# Altium PCB Pcb.PcbDoc
Units mm, origin at the board's own origin, x right, y up, seen from the top; angles counter-clockwise.
Board outline 100.6 x 141.6 mm, 2 copper layers (Top Layer, Bottom Layer); 201 components, 79 nets, 330 pads, 79 vias.
Unrouted connection lines stored in the file: 3.
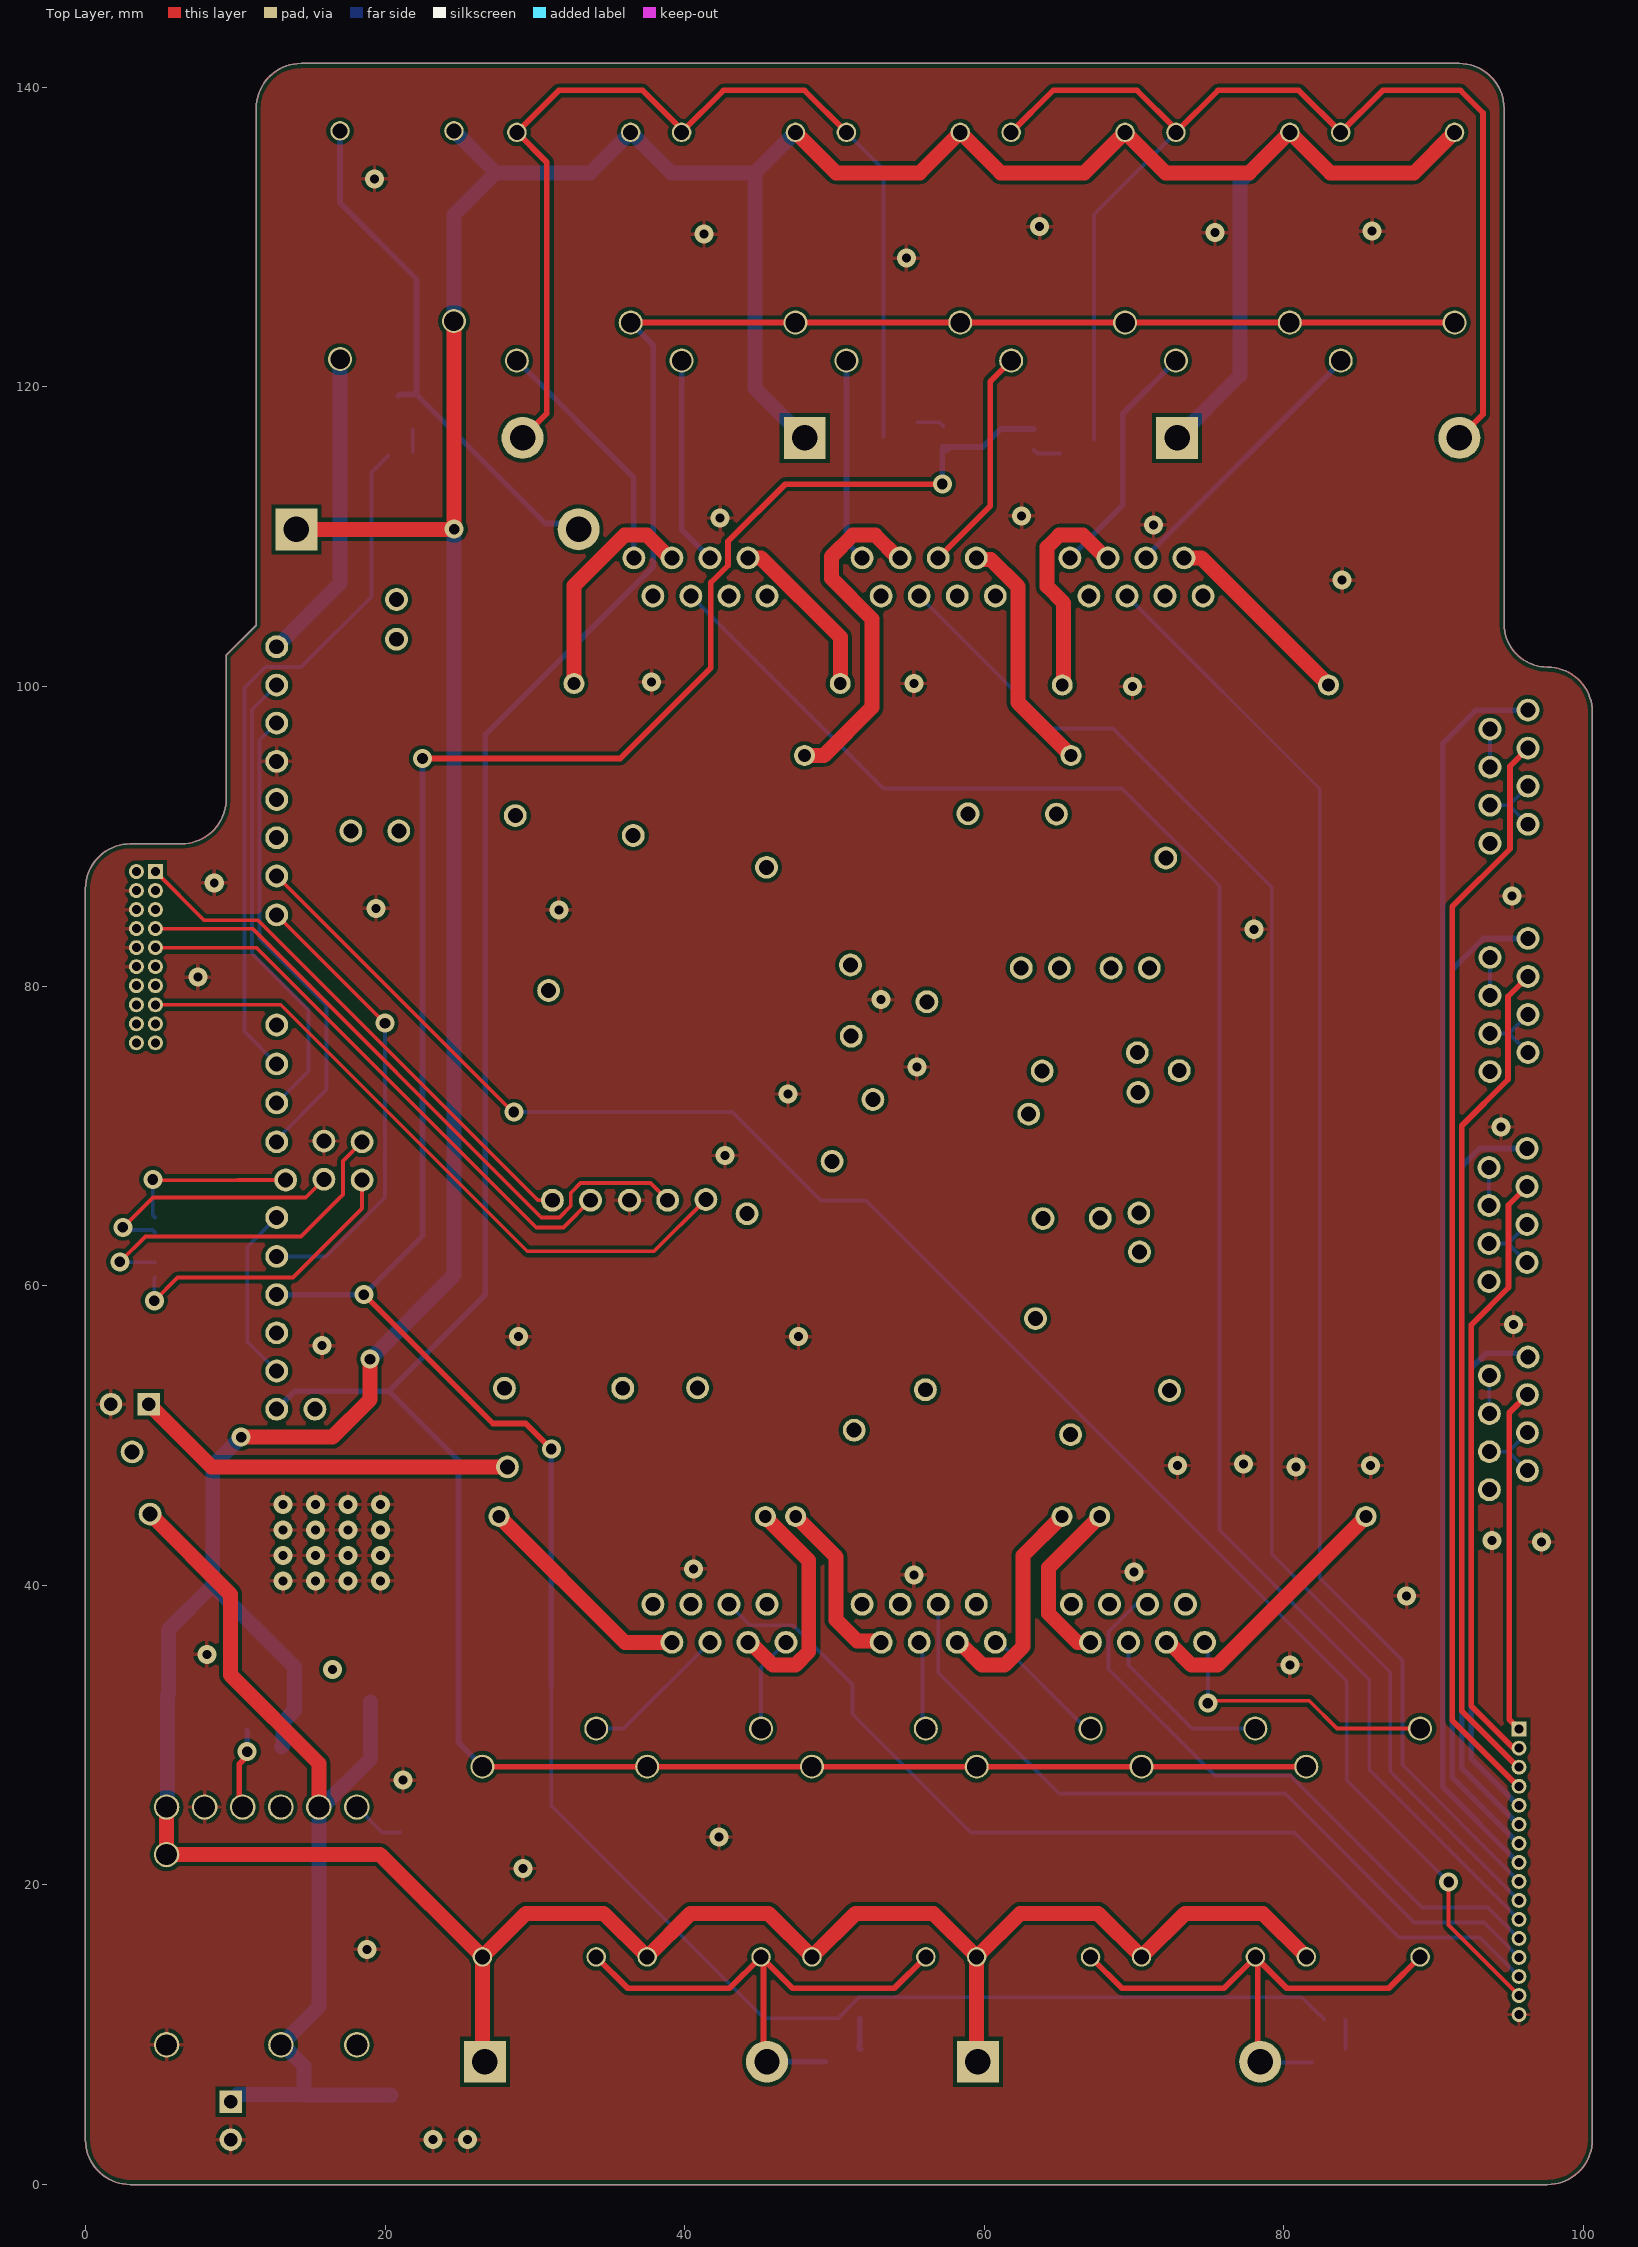
[diagram p0: Top Layer view]
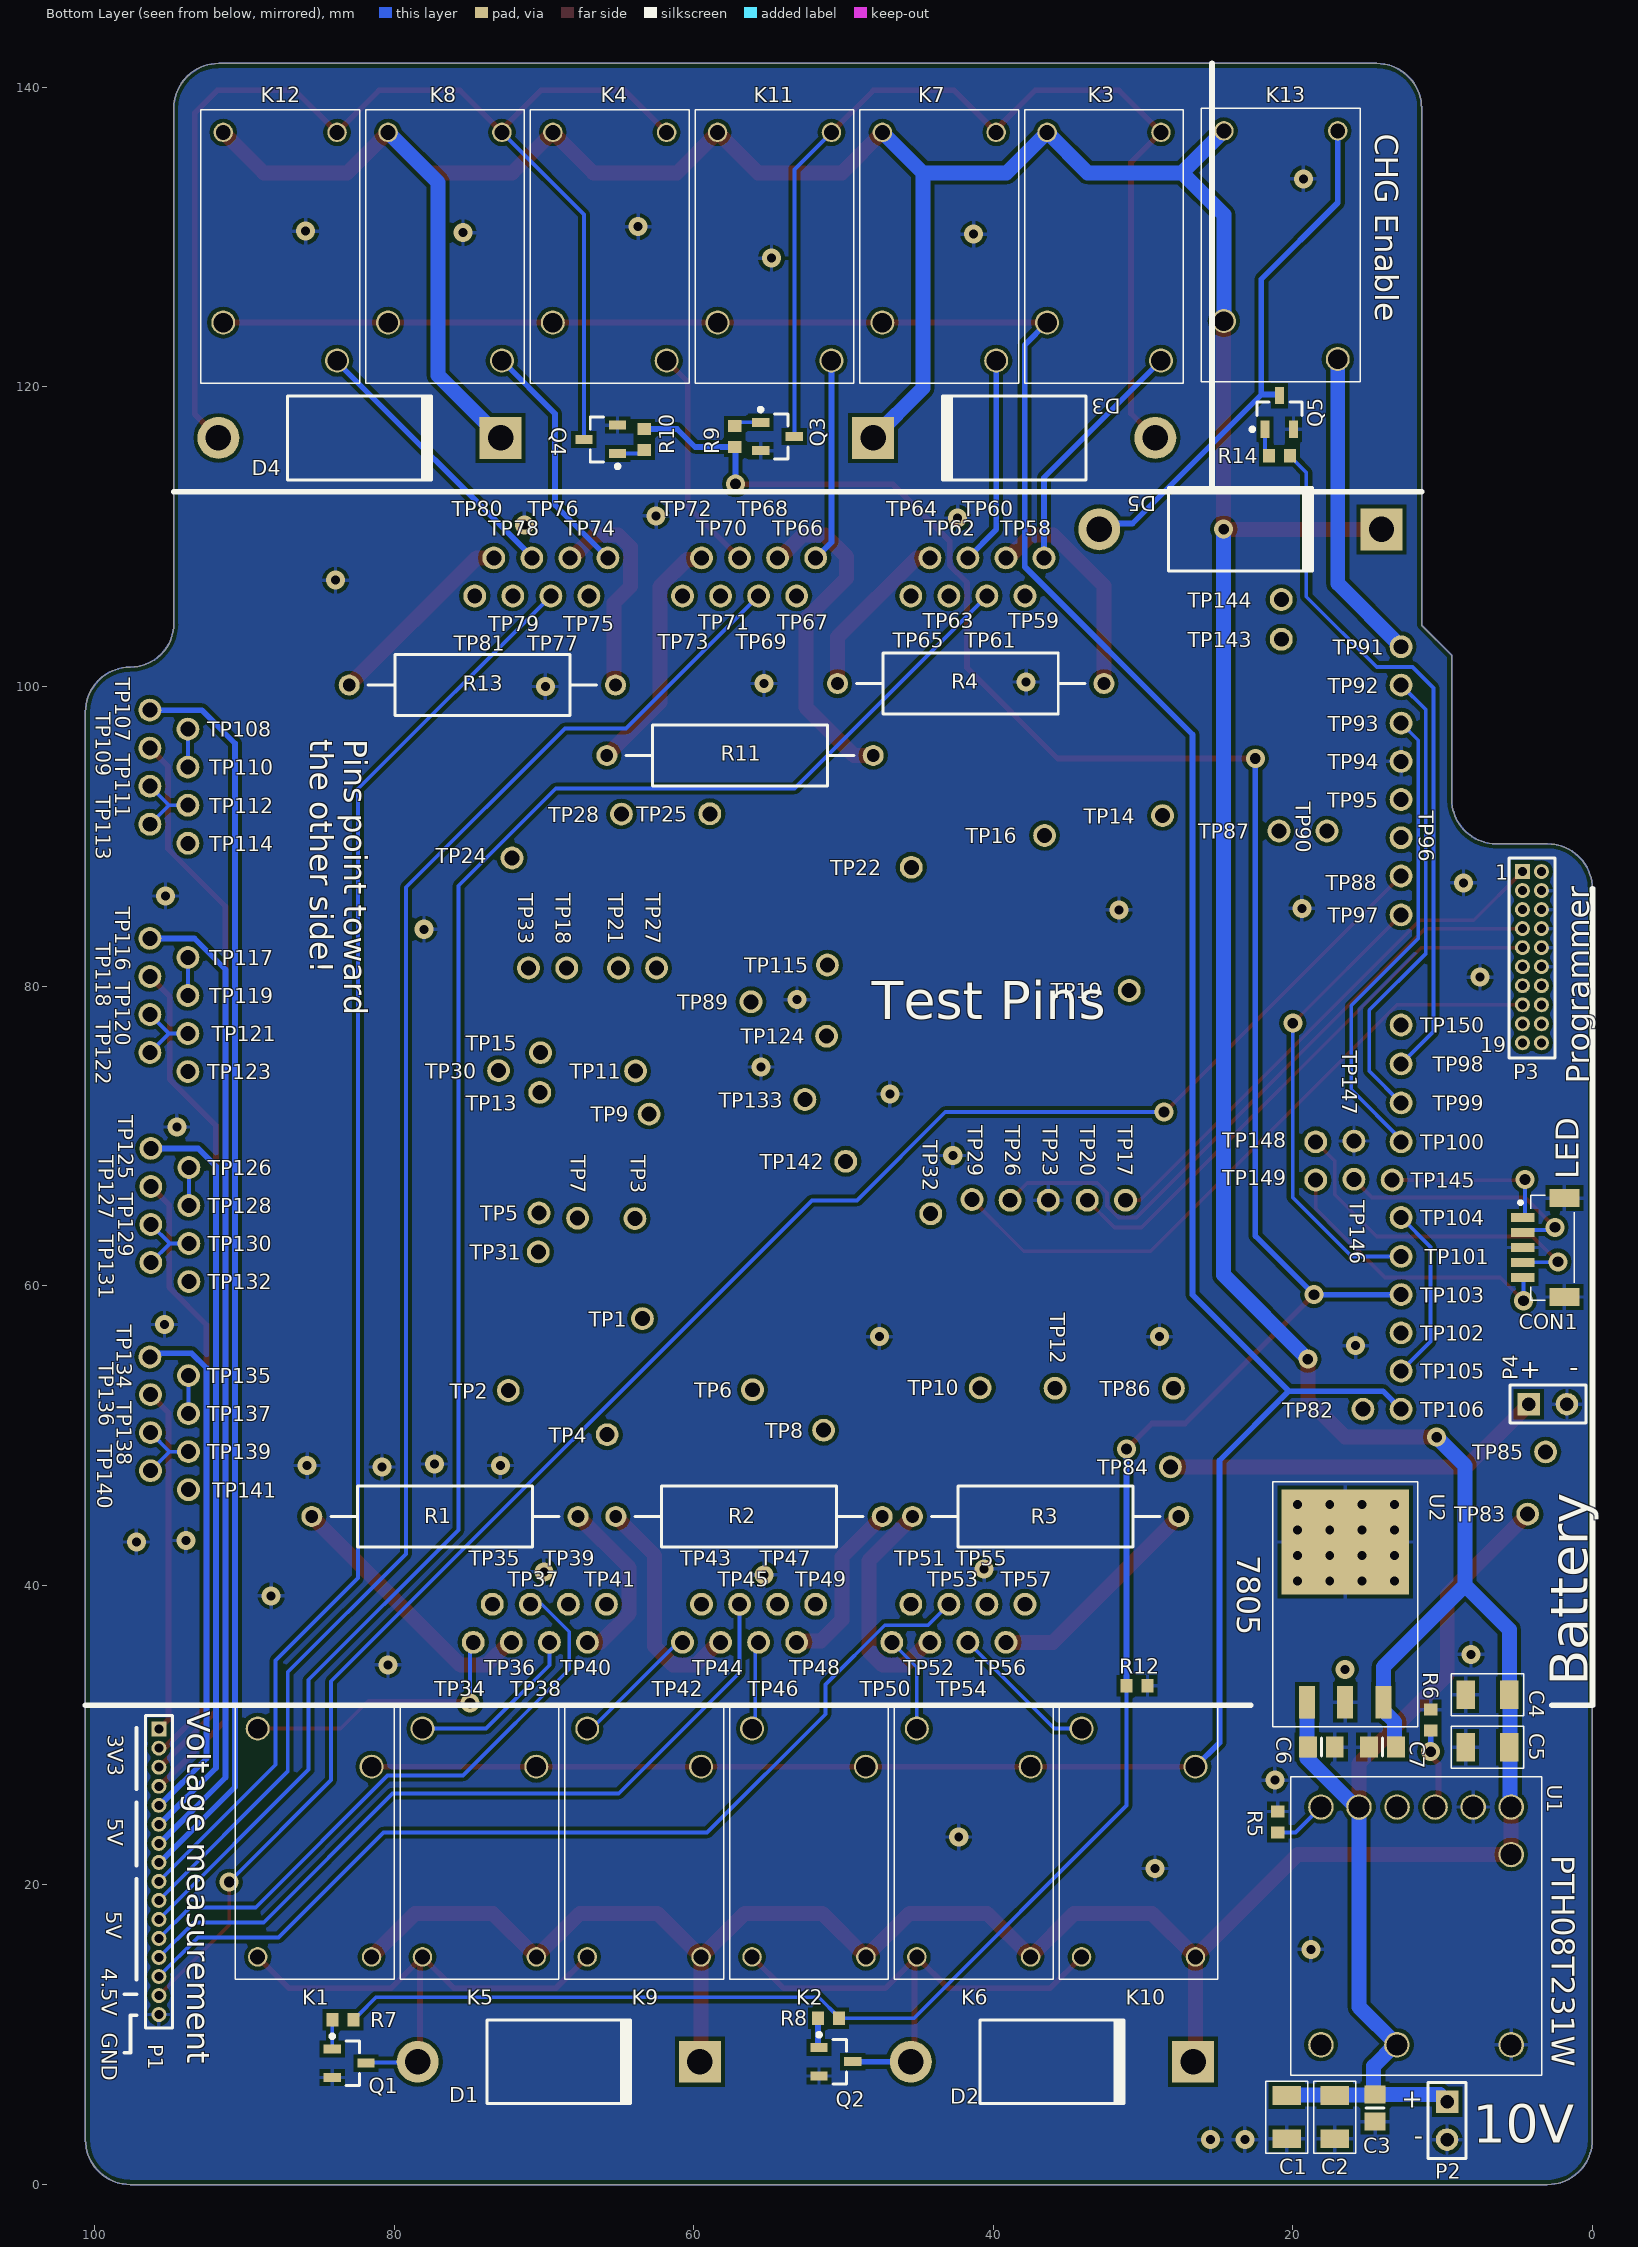
[diagram p1: Bottom Layer view, seen from below]

## Layer stack, top to bottom
Top Solder: solder mask 0.0102, Solder Resist, Dk 3.5
Top Layer: signal copper 0.0356
Dielectric 1: dielectric 0.32, FR-4, Dk 4.8
Bottom Layer: signal copper 0.0356
Bottom Solder: solder mask 0.0102, Solder Resist, Dk 3.5

## Board outline
0,3 ccw(c3,3) 3,0 97.6,0 ccw(c97.6,3) 100.6,3 100.6,98.3 ccw(c97.6,98.3) 97.6,101.3 cw(c97.6,104.2) 94.7,104.2 94.7,138.6 ccw(c91.7,138.6) 91.7,141.6 14.4,141.6 ccw(c14.4,138.6) 11.4,138.6 11.4,104.1 9.4,102.1 9.4,92.5 cw(c6.4,92.5) 6.4,89.5 3,89.5 ccw(c3,86.5) 0,86.5

## Design rules (kind name [scope] priority, off if disabled: settings)
Clearance [All] p1: gap=0.254 ignorepadtopadclearanceinfootprint=FALSE except(0: Arc-Hole Track-Hole SMDPad-Hole THPad-Hole Via-Hole Fill-Hole Poly-Hole Region-Hole Text-Hole)
MinimumSolderMaskSliver [All] p1: minsoldermaskwidth=0.1
PolygonConnect [All] p1: connectstyle=Relief reliefconductorwidth=0.254 reliefentries=4 polygonreliefangle="90 Angle" airgapwidth=0.254
RoutingVias [All] p1: holewidth=0.711 width=1.27 viastyle="Through Hole" minholewidth=0.711 minwidth=1.27 maxholewidth=0.711 maxwidth=1.27
SilkToSolderMaskClearance [IsPad] p1: minsilkscreentomaskgap=0.1 clearancetoexposedcopper=TRUE
SolderMaskExpansion [All] p1: expansion=0.102
Width [All] p1: maxlimit=2.54 minlimit=0.254 preferedwidth=0.254
28 further rules are at their usual default settings.

## Components (designator, comment, footprint, x,y, rotation, side; value= is the part's Value field where it differs from the comment)
C1 "CL31A107MPKNNWE" C3216 20.4,4.5 r90 bottom value=100uF
C2 "CL31A107MPKNNWE" C3216 17.2,4.5 r90 bottom value=100uF
C3 "Cap" 6-0805_N 14.5,5.1 r90 bottom value=22uF
C4 "CL31A107MPKNNWE" C3216 7,32.7 r180 bottom value=100uF
C5 "CL31A107MPKNNWE" C3216 7,29.2 r180 bottom value=100uF
C6 "Cap" 6-0805_N 18.1,29.2 r0 bottom value=220nF
C7 "Cap" 6-0805_N 14,29.2 r180 bottom value=220nF
CON1 "A1001-WR-05-NP" "LED MOLEX" 2.5,62.7 r270 bottom
D1 "1N5406-TP" DO-201AD 69,8.2 r180 bottom
D2 "1N5406-TP" DO-201AD 36.08,8.2 r180 bottom
D3 "1N5406-TP" DO-201AD 38.6,116.6 r0 bottom
D4 "1N5406-TP" DO-201AD 82.3,116.6 r180 bottom
D5 "1N5406-TP" DO-201AD 23.5,110.5 r180 bottom
K1 "Relay-SPST" AHQSH105LM100G 81.5,15.2 r90 bottom
K2 "Relay-SPST" AHQSH105LM100G 48.5,15.2 r90 bottom
K3 "Relay-SPST" AHQSH105LM100G 36.4,137 r270 bottom
K4 "Relay-SPST" AHQSH105LM100G 69.4,137 r270 bottom
K5 "Relay-SPST" AHQSH105LM100G 70.5,15.2 r90 bottom
K6 "Relay-SPST" AHQSH105LM100G 37.5,15.2 r90 bottom
K7 "Relay-SPST" AHQSH105LM100G 47.4,137 r270 bottom
K8 "Relay-SPST" AHQSH105LM100G 80.4,137 r270 bottom
K9 "Relay-SPST" AHQSH105LM100G 59.5,15.2 r90 bottom
K10 "Relay-SPST" AHQSH105LM100G 26.5,15.2 r90 bottom
K11 "Relay-SPST" AHQSH105LM100G 58.4,137 r270 bottom
K12 "Relay-SPST" AHQSH105LM100G 91.4,137 r270 bottom
K13 "Relay-SPST" AHQSH105LM100G 24.6,137.1 r270 bottom
P1 "MHDR1X16" MHDR1X16 95.7,30.4 r270 bottom
P2 "Header 2" HDR1X2 9.7,5.54 r270 bottom
P3 "MHDR2X10" MHDR2X10 4.67,87.65 r270 bottom
P4 "Header 2" HDR1X2 4.24,52.1 r180 bottom
Q1 "NPN" SOT-23_N 83,8.1 r180 bottom
Q2 "NPN" SOT-23_N 50.5,8.2 r180 bottom
Q3 "NPN" SOT-23_N 54.4,116.696 r180 bottom
Q4 "NPN" SOT-23_N 66.2,116.5 r0 bottom
Q5 "NPN" SOT-23_N 20.9,118.3 r90 bottom
R1 "Res2" AXIAL-0.7 76.6,44.6 r180 bottom value=10
R2 "Res2" AXIAL-0.7 56.3,44.6 r180 bottom value=10
R3 "Res2" AXIAL-0.7 36.5,44.6 r180 bottom value=10
R4 "Res2" AXIAL-0.7 41.5,100.2 r0 bottom value=10
R5 "Res2" 1608[0603] 21,24.2 r270 bottom value=20K
R6 "Res2" 1608[0603] 10.8,31 r270 bottom value=100K
R7 "Res2" 1608[0603] 83.4,11 r0 bottom value=1K
R8 "Res2" 1608[0603] 51,11.104 r0 bottom value=1K
R9 "Res2" 1608[0603] 57.254,116.7 r90 bottom value=1K
R10 "Res2" 1608[0603] 63.3,116.5 r270 bottom value=1K
R11 "Res2" AXIAL-0.7 56.9,95.4 r0 bottom value=10
R12 "Res2" 1608[0603] 30.4,33.3 r0 bottom value=1K
R13 "Res2" AXIAL-0.7 74.1,100.1 r0 bottom value=10
R14 "Res2" 1608[0603] 20.9,115.4 r0 bottom value=1K
TP1 "Pin" PIN 63.42,57.81 r90 bottom locked
TP2 "Pin" PIN 72.37,53.01 r90 bottom locked
TP3 "Pin" PIN 63.92,64.485 r90 bottom locked
TP4 "Pin" PIN 65.77,50.06 r90 bottom locked
TP5 "Pin" PIN 70.32,64.86 r90 bottom locked
TP6 "Pin" PIN 56.07,53.06 r90 bottom locked
TP7 "Pin" PIN 67.745,64.51 r90 bottom locked
TP8 "Pin" PIN 51.32,50.36 r90 bottom locked
TP9 "Pin" PIN 62.97,71.46 r90 bottom locked
TP10 "Pin" PIN 40.87,53.185 r90 bottom locked
TP11 "Pin" PIN 63.87,74.335 r90 bottom locked
TP12 "Pin" PIN 35.87,53.16 r90 bottom locked
TP13 "Pin" PIN 70.27,72.91 r90 bottom locked
TP14 "Pin" PIN 28.695,91.385 r90 bottom locked
TP15 "Pin" PIN 70.22,75.56 r90 bottom locked
TP16 "Pin" PIN 36.57,90.06 r90 bottom locked
TP17 "Pin" PIN 31.17,65.71 r90 bottom locked
TP18 "Pin" PIN 68.47,81.21 r90 bottom locked
TP19 "Pin" PIN 30.92,79.71 r90 bottom locked
TP20 "Pin" PIN 33.72,65.71 r90 bottom locked
TP21 "Pin" PIN 65.02,81.21 r90 bottom locked
TP22 "Pin" PIN 45.47,87.935 r90 bottom locked
TP23 "Pin" PIN 36.32,65.71 r90 bottom locked
TP24 "Pin" PIN 72.12,88.56 r90 bottom locked
TP25 "Pin" PIN 58.92,91.51 r90 bottom locked
TP26 "Pin" PIN 38.87,65.71 r90 bottom locked
TP27 "Pin" PIN 62.47,81.21 r90 bottom locked
TP28 "Pin" PIN 64.82,91.485 r90 bottom locked
TP29 "Pin" PIN 41.42,65.76 r90 bottom locked
TP30 "Pin" PIN 73.02,74.36 r90 bottom locked
TP31 "Pin" PIN 70.37,62.26 r90 bottom locked
TP32 "Pin" PIN 44.17,64.81 r90 bottom locked
TP33 "Pin" PIN 71.02,81.21 r90 bottom locked
TP34 "Pin" PIN 74.71,36.2 r270 bottom locked
TP35 "Pin" PIN 73.44,38.74 r270 bottom locked
TP36 "Pin" PIN 72.17,36.2 r270 bottom locked
TP37 "Pin" PIN 70.9,38.74 r270 bottom locked
TP38 "Pin" PIN 69.63,36.2 r270 bottom locked
TP39 "Pin" PIN 68.36,38.74 r270 bottom locked
TP40 "Pin" PIN 67.09,36.2 r270 bottom locked
TP41 "Pin" PIN 65.82,38.74 r270 bottom locked
TP42 "Pin" PIN 60.74,36.2 r270 bottom locked
TP43 "Pin" PIN 59.47,38.74 r270 bottom locked
TP44 "Pin" PIN 58.2,36.2 r270 bottom locked
TP45 "Pin" PIN 56.93,38.74 r270 bottom locked
TP46 "Pin" PIN 55.66,36.2 r270 bottom locked
TP47 "Pin" PIN 54.39,38.74 r270 bottom locked
TP48 "Pin" PIN 53.12,36.2 r270 bottom locked
TP49 "Pin" PIN 51.85,38.74 r270 bottom locked
TP50 "Pin" PIN 46.77,36.2 r270 bottom locked
TP51 "Pin" PIN 45.5,38.74 r270 bottom locked
TP52 "Pin" PIN 44.23,36.2 r270 bottom locked
TP53 "Pin" PIN 42.96,38.74 r270 bottom locked
TP54 "Pin" PIN 41.69,36.2 r270 bottom locked
TP55 "Pin" PIN 40.42,38.74 r270 bottom locked
TP56 "Pin" PIN 39.15,36.2 r270 bottom locked
TP57 "Pin" PIN 37.88,38.74 r270 bottom locked
TP58 "Pin" PIN 36.61,108.59 r90 bottom locked
TP59 "Pin" PIN 37.88,106.05 r90 bottom locked
TP60 "Pin" PIN 39.15,108.59 r90 bottom locked
TP61 "Pin" PIN 40.42,106.05 r90 bottom locked
TP62 "Pin" PIN 41.69,108.59 r90 bottom locked
TP63 "Pin" PIN 42.96,106.05 r90 bottom locked
TP64 "Pin" PIN 44.23,108.59 r90 bottom locked
TP65 "Pin" PIN 45.5,106.05 r90 bottom locked
TP66 "Pin" PIN 51.85,108.59 r90 bottom locked
TP67 "Pin" PIN 53.12,106.05 r90 bottom locked
TP68 "Pin" PIN 54.39,108.59 r90 bottom locked
TP69 "Pin" PIN 55.66,106.05 r90 bottom locked
TP70 "Pin" PIN 56.93,108.59 r90 bottom locked
TP71 "Pin" PIN 58.2,106.05 r90 bottom locked
TP72 "Pin" PIN 59.47,108.59 r90 bottom locked
TP73 "Pin" PIN 60.74,106.05 r90 bottom locked
TP74 "Pin" PIN 65.72,108.59 r90 bottom locked
TP75 "Pin" PIN 66.99,106.05 r90 bottom locked
TP76 "Pin" PIN 68.26,108.59 r90 bottom locked
TP77 "Pin" PIN 69.53,106.05 r90 bottom locked
TP78 "Pin" PIN 70.8,108.59 r90 bottom locked
TP79 "Pin" PIN 72.07,106.05 r90 bottom locked
TP80 "Pin" PIN 73.34,108.59 r90 bottom locked
TP81 "Pin" PIN 74.61,106.05 r90 bottom locked
TP82 "Pin" PIN 15.32,51.76 r90 bottom locked
TP83 "Pin" PIN 4.32,44.76 r90 bottom locked
TP84 "Pin" PIN 28.17,47.91 r90 bottom locked
TP85 "Pin" PIN 3.12,48.91 r90 bottom locked
TP86 "Pin" PIN 27.97,53.16 r90 bottom locked
TP87 "Pin" PIN 20.92,90.36 r90 bottom locked
TP88 "Pin" PIN 12.77,87.36 r90 bottom locked
TP89 "Pin" PIN 56.17,78.96 r90 bottom locked
TP90 "Pin" PIN 17.72,90.36 r0 bottom locked
TP91 "Pin" PIN 12.77,102.66 r180 bottom locked
TP92 "Pin" PIN 12.77,100.1 r180 bottom locked
TP93 "Pin" PIN 12.77,97.56 r180 bottom locked
TP94 "Pin" PIN 12.77,95.01 r180 bottom locked
TP95 "Pin" PIN 12.77,92.46 r180 bottom locked
TP96 "Pin" PIN 12.77,89.91 r180 bottom locked
TP97 "Pin" PIN 12.77,84.76 r90 bottom locked
TP98 "Pin" PIN 12.77,74.81 r180 bottom locked
TP99 "Pin" PIN 12.77,72.21 r180 bottom locked
TP100 "Pin" PIN 12.77,69.61 r180 bottom locked
TP101 "Pin" PIN 12.77,61.96 r180 bottom locked
TP102 "Pin" PIN 12.77,56.86 r90 bottom locked
TP103 "Pin" PIN 12.77,59.41 r180 bottom locked
TP104 "Pin" PIN 12.77,64.56 r180 bottom locked
TP105 "Pin" PIN 12.77,54.31 r180 bottom locked
TP106 "Pin" PIN 12.77,51.76 r180 bottom locked
TP107 "Pin" PIN 96.3,98.43 r180 bottom locked
TP108 "Pin" PIN 93.76,97.16 r180 bottom locked
TP109 "Pin" PIN 96.3,95.89 r180 bottom locked
TP110 "Pin" PIN 93.76,94.62 r180 bottom locked
TP111 "Pin" PIN 96.3,93.35 r180 bottom locked
TP112 "Pin" PIN 93.76,92.08 r180 bottom locked
TP113 "Pin" PIN 96.3,90.81 r180 bottom locked
TP114 "Pin" PIN 93.76,89.54 r180 bottom locked
TP115 "Pin" PIN 51.07,81.41 r90 bottom locked
TP116 "Pin" PIN 96.3,83.19 r180 bottom locked
TP117 "Pin" PIN 93.76,81.92 r180 bottom locked
TP118 "Pin" PIN 96.3,80.65 r180 bottom locked
TP119 "Pin" PIN 93.76,79.38 r180 bottom locked
TP120 "Pin" PIN 96.3,78.11 r180 bottom locked
TP121 "Pin" PIN 93.76,76.84 r180 bottom locked
TP122 "Pin" PIN 96.3,75.57 r180 bottom locked
TP123 "Pin" PIN 93.76,74.3 r180 bottom locked
TP124 "Pin" PIN 51.12,76.66 r90 bottom locked
TP125 "Pin" PIN 96.235,69.17 r180 bottom locked
TP126 "Pin" PIN 93.695,67.9 r180 bottom locked
TP127 "Pin" PIN 96.235,66.63 r180 bottom locked
TP128 "Pin" PIN 93.695,65.36 r180 bottom locked
TP129 "Pin" PIN 96.235,64.09 r180 bottom locked
TP130 "Pin" PIN 93.695,62.82 r180 bottom locked
TP131 "Pin" PIN 96.235,61.55 r180 bottom locked
TP132 "Pin" PIN 93.695,60.28 r180 bottom locked
TP133 "Pin" PIN 52.57,72.435 r90 bottom locked
TP134 "Pin" PIN 96.3,55.25 r180 bottom locked
TP135 "Pin" PIN 93.72,54.005 r180 bottom locked
TP136 "Pin" PIN 96.26,52.735 r180 bottom locked
TP137 "Pin" PIN 93.72,51.465 r180 bottom locked
TP138 "Pin" PIN 96.26,50.195 r180 bottom locked
TP139 "Pin" PIN 93.72,48.925 r180 bottom locked
TP140 "Pin" PIN 96.26,47.655 r180 bottom locked
TP141 "Pin" PIN 93.72,46.385 r180 bottom locked
TP142 "Pin" PIN 49.845,68.31 r90 bottom locked
TP143 "Pin" PIN 20.77,103.16 r90 bottom locked
TP144 "Pin" PIN 20.77,105.81 r90 bottom locked
TP145 "Pin" PIN 13.37,67.06 r90 bottom locked
TP146 "Pin" PIN 15.92,67.11 r90 bottom locked
TP147 "Pin" PIN 15.92,69.66 r90 bottom locked
TP148 "Pin" PIN 18.47,69.61 r90 bottom locked
TP149 "Pin" PIN 18.47,67.06 r90 bottom locked
TP150 "Pin" PIN 12.77,77.41 r90 bottom locked
U1 "PTH08T231W" PTH08T231W 5.42,9.33 r90 bottom
U2 "7805S" TO-263-3 16.5,32.2 r90 bottom

## Footprints (in the part's own frame and the unit in brackets; to place one, negate y for a bottom-side part, rotate by r counter-clockwise, add the part's x,y. Pads: shape width x height; smd on the part's side, far side on the other; paste and mask are expansions set on the pad)
6-0805_N [mm] "Chip Resistor, Body 2.0x1.2mm, IPC Medium Density"
  rect 1.2x1.4 smd: 1(-0.9,0) 2(0.9,0)
  silkscreen extent 0,-0.6 0,0.6, body extent -1.07,-0.7 1.07,0.7, height 0.7
1608[0603] [mm] "Chip Capacitor, Body 1.6x0.8mm, IPC High Density"
  rect 0.8x0.9 smd: 1(-0.7,0) 2(0.7,0)
  body extent -0.87,-0.48 0.87,0.48, height 1.3
AHQSH105LM100G [mm]
  round 1.6 hole 1.3: 1(12.7,0) 2(15.24,7.6)
  round 1.3 hole 1: 3(0,0) 4(0,7.6)
  silkscreen extent -1.5,-1.5 16.74,9.1
AXIAL-0.7 [mm] "Axial Device, Thru-Hole; 2 Leads; 0.7 in Pin Spacing"
  round 1.4 hole 0.85: 1(-8.89,0) 2(8.89,0)
  silkscreen extent -7.62,-2.03 7.62,2.03
C3216 [mm]
  rect 1.25x1.9 smd: 1(-1.45,0) 2(1.45,0)
  silkscreen extent -2.41,-1.4 2.41,1.4
DO-201AD [mm] "Diode, Axial; Body 9.5 x 5.6 mm (LxDia. max), Lead Dia. 1.32 mm (max)"
  round 2.8 hole 1.7: 1(-9.42,0)
  rect 2.8x2.8 hole 1.7: 2(9.42,0)
  silkscreen extent -4.8,-2.8 4.9,2.8
HDR1X2 [mm] "Connector; Header; 2 Position"
  rect 1.5x1.5 hole 0.9: 1(0,0)
  round 1.5 hole 0.9: 2(2.54,0)
  silkscreen extent -1.27,-1.27 3.81,1.27
"LED MOLEX" [mm]
  rect 0.6x1.55 smd paste-0.025 mask+0.05: 1(-1.85,-2.15) 2(-0.85,-2.15) 3(0.15,-2.15) 4(1.15,-2.15) 5(2.15,-2.15)
  rect 1.2x2 smd paste-0.025 mask+0.05: SH(-3.15,0.625) SH(3.45,0.625)
  silkscreen extent -3.35,-2.4 3.65,1.3, body extent -3.35,-2.3 3.65,1.3, height 4.28
MHDR1X16 [mm] "Connector; Header; 16 Position"
  rect 1x1 hole 0.6: 1(0,0)
  round 1 hole 0.6: 2(1.27,0) 3(2.54,0) 4(3.81,0) 5(5.08,0) 6(6.35,0) 7(7.62,0) 8(8.89,0) 9(10.16,0) 10(11.43,0) 11(12.7,0) 12(13.97,0) 13(15.24,0) 14(16.51,0) 15(17.78,0) 16(19.05,0)
  silkscreen extent -0.9,-0.9 19.95,0.9
MHDR2X10 [mm] "Connector; Header; 10x2 Position"
  rect 1x1 hole 0.6: 1(0,0)
  round 1 hole 0.6: 2(0,1.27) 3(1.27,0) 4(1.27,1.27) 5(2.54,0) 6(2.54,1.27) 7(3.81,0) 8(3.81,1.27) 9(5.08,0) 10(5.08,1.27) 11(6.35,0) 12(6.35,1.27) 13(7.62,0) 14(7.62,1.27) 15(8.89,0) 16(8.89,1.27) 17(10.16,0) 18(10.16,1.27) 19(11.43,0) 20(11.43,1.27)
  silkscreen extent -0.9,-0.9 12.43,2.17
PIN [mil] "Test pin"
  round 60 hole 39.37: 1(0,0)
PTH08T231W [mm]
  round 1.7 hole 1.4: 1(0,12.7) 2(0,7.63) 3(0,0) 4(12.7,0) 5(15.87,0) 6(15.87,2.54) 7(15.87,5.08) 8(15.87,7.62) 9(15.87,10.16) 10(15.87,12.7)
  silkscreen extent -2.03,-2.03 17.9,14.73
SOT-23_N [mm] "SOT23, 3-Leads, Body 2.9x1.3mm, Pitch 0.95mm, Lead Span 2.5mm, IPC Medium Density"
  rect 1.15x0.6 smd: 1(-1.125,0.95) 2(-1.125,-0.95) 3(1.125,0)
  silkscreen extent -1.25,-1.5 0.7,1.92, body extent -0.7,-1.5 0.7,1.5, height 1.1
TO-263-3 [mm]
  rect 2.16x1.07 smd: 1(0,2.54) 2(0,0) 3(0,-2.54)
  rect 7x8.5 smd: 4(10.7,0)
  silkscreen extent -1.65,-4.83 14.73,4.83

## Part data
C1 C2 C4 C5: library part Cap, "Capacitor", LatestRevisionDate=17-Jul-2002, LatestRevisionNote="Re-released for DXP Platform.", PackageDescription="Radial Cap, Thru-Hole; 2 Leads; 0.3 in Pin Spacing", PackageReference=RAD-0.3, PartNumber=CL31A107MPKNNWE, Published=8-Jun-2000, Publisher="Altium Limited"
C3 C6 C7: "Capacitor", LatestRevisionDate=17-Jul-2002, LatestRevisionNote="Re-released for DXP Platform.", PackageDescription="Radial Cap, Thru-Hole; 2 Leads; 0.3 in Pin Spacing", PackageReference=RAD-0.3, Published=8-Jun-2000, Publisher="Altium Limited"
CON1: library part "LED molex", PartNumber=A1001-WR-05-NP
D1 D2 D3 D4 D5: library part Diode, Code_JEDEC=DO-214-AB, LatestRevisionDate=17-Jul-2002, LatestRevisionNote="Re-released for DXP Platform.", PackageDescription="DO-214-AB/SMC; 2 C-Bend Leads; Body 7.9 x 5.9 mm, inc. leads (LxW)", PackageReference=SMC, PackageVersion=Sep-1996, PartNumber=1N5406-TP, Published=8-Jun-2000, Publisher="Altium Limited"
K1 K2 K3 K4 K5 K6 K7 K8 K9 K10 K11 K12 K13: "Single-Pole Single-Throw Relay", LatestRevisionDate=17-Jul-2002, LatestRevisionNote="Re-released for DXP Platform.", PackageReference=MODULE4, Published=24-Mar-1999, Publisher="Altium Limited"
P1: "Header, 16-Pin", LatestRevisionDate=17-Jul-2002, LatestRevisionNote="Re-released for DXP Platform.", Publisher="Altium Limited"
P2 P4: "Header, 2-Pin", LatestRevisionDate=17-Jul-2002, LatestRevisionNote="Re-released for DXP Platform.", Publisher="Altium Limited"
P3: "Header, 10-Pin, Dual row", LatestRevisionDate=17-Jul-2002, LatestRevisionNote="Re-released for DXP Platform.", Publisher="Altium Limited"
Q1 Q2 Q3 Q4 Q5: "NPN Bipolar Transistor MMBT2222A", Part Number=MMBT2222A, Code_JEDEC=TO-226-AA, LatestRevisionDate=17-Jul-2002, LatestRevisionNote="Re-released for DXP Platform.", PackageDescription="TO, Flat Index; 3 In-Line, Axial Leads; Body Dia. 4.8mm; Leads 0.55 x 0.51 mm (max)", PackageReference=TO-226-AA, Published=8-Jun-2000, Publisher="Altium Limited"
R1 R2 R3 R4 R11 R13: "Resistor EP5WS10RJ 10R 5W", PartNumber=EP5WS10RJ, LatestRevisionDate=17-Jul-2002, LatestRevisionNote="Re-released for DXP Platform.", PackageDescription="Axial Device, Thru-Hole; 2 Leads; 0.4 in Pin Spacing", PackageReference=AXIAL-0.4, Published=8-Jun-2000, Publisher="Altium Limited"
R5 R6 R7 R8 R9 R10 R12 R14: "Resistor", LatestRevisionDate=17-Jul-2002, LatestRevisionNote="Re-released for DXP Platform.", PackageDescription="Axial Device, Thru-Hole; 2 Leads; 0.4 in Pin Spacing", PackageReference=AXIAL-0.4, Published=8-Jun-2000, Publisher="Altium Limited"
TP1 TP2 TP3 TP4 TP5 TP6 TP7 TP8 TP9 TP10 TP11 TP12 TP13 TP14 TP15 TP16 TP17 TP18 TP19 TP20 TP21 TP22 TP23 TP24 TP25 TP26 TP27 TP28 TP29 TP30 TP31 TP32 TP33 TP34 TP35 TP36 TP37 TP38 TP39 TP40 TP41 TP42 TP43 TP44 TP45 TP46 TP47 TP48 TP49 TP50 TP51 TP52 TP53 TP54 TP55 TP56 TP57 TP58 TP59 TP60 TP61 TP62 TP63 TP64 TP65 TP66 TP67 TP68 TP69 TP70 TP71 TP72 TP73 TP74 TP75 TP76 TP77 TP78 TP79 TP80 TP81 TP82 TP83 TP84 TP85 TP86 TP87 TP88 TP89 TP90 TP91 TP92 TP93 TP94 TP95 TP96 TP97 TP98 TP99 TP100 TP101 TP102 TP103 TP104 TP105 TP106 TP107 TP108 TP109 TP110 TP111 TP112 TP113 TP114 TP115 TP116 TP117 TP118 TP119 TP120 TP121 TP122 TP123 TP124 TP125 TP126 TP127 TP128 TP129 TP130 TP131 TP132 TP133 TP134 TP135 TP136 TP137 TP138 TP139 TP140 TP141 TP142 TP143 TP144 TP145 TP146 TP147 TP148 TP149 TP150: "Testing pin"

## Via types
v1: diameter 1.27, hole 0.6, Top Layer to Bottom Layer, tented both sides, 63 vias
v2: diameter 1.27, hole 0.711, Top Layer to Bottom Layer, tented both sides, 16 vias

## Nets (pads, with @x,y where several pads share a name; then routed paths per layer and width w, separated by ;. In a path a pad name is that pad's centre, name@x,y a point inside that pad or via, vN(x,y) a via of type N, cw(c..) or ccw(c..) an arc to the next point about the centre after c; other vN are vias at no path point)
5V: CON1.1 TP145.1 | length 11.5
  Top Layer w0.254: v2(4.5,67.1) 4.55,67.05 10.15,67.05 10.16,67.06 TP145.1
  Bottom Layer w0.254: v2(4.5,67.1) 4.5,64.7 CON1.1
+5: C4.2 C5.2 C7.2 D1.2 D2.2 D3.2 D4.2 D5.2 K1.3 K2.3 K3.3 K4.3 K5.3 K6.3 K7.3 K8.3 K9.3 K10.3 K11.3 K12.3 K13.1 K13.3 U1.4 U1.5 U2.3 | length 377.4
  Top Layer w1: U1.5 U1.4 19.67,22.03 K10.3 ; v2(10.4,49.9) 16.5,49.9 19,52.4 v2(19,55.1) ; D5.2 24.6,110.5 v2(24.613,110.513) 24.613,124.387 K13.1 ; D2.2@26.58,8.2 26.5,8.28 K10.3 ; K7.3 50.1,134.3 55.7,134.3 K11.3 61.1,134.3 66.7,134.3 K4.3 72.1,134.3 77.7,134.3 K8.3 83.1,134.3 88.7,134.3 K12.3 ; D1.2 59.5,8.28 K9.3 ; K1.3 78.6,18.1 73.4,18.1 K5.3 67.6,18.1 62.4,18.1 K9.3 ; K10.3 29.4,18.1 34.6,18.1 K6.3 40.4,18.1 45.6,18.1 K2.3 51.4,18.1 56.6,18.1 K9.3
  Bottom Layer w1: U1.5 5.485,25.265 5.485,32.635 C4.2 5.55,37.05 8.5,40 8.5,40.005 ; v2(10.4,49.9) 8.5,48 8.5,40.005 ; C7.2 13.2,29.3 13.2,30.895 13.96,31.655 U2.3 13.96,34.545 8.5,40.005 ; D5.2@14.08,109.88 D5.2 ; v2(19,55.1) 24.613,60.712 v2(24.613,110.513) ; K13.1 24.6,131.5 27.4,134.3 ; K13.3 27.4,134.3 ; K7.3 44.7,134.3 ; D3.2 44.7,119.92 44.7,134.3 ; D4.2 77.061,120.781 77.061,133.661 K8.3 ; 27.4,134.3 33.7,134.3 K3.3 39.1,134.3 44.7,134.3
+10: C1.2 C2.2 C3.2 C6.2 P2.1 TP83.1 U1.2 U1.9 U2.1 | length 64.7
  Top Layer w1: TP83.1 9.689,39.391 9.689,34.011 15.58,28.12 U1.9
  Bottom Layer w1: P2.1 10.16,6 C3.2 ; U2.1 19.04,28.44 15.8,25.2 U1.9 15.58,11.86 U1.2 13.17,9.33 14.6,7.9 14.6,6.1 C3.2 ; C1.2 20.375,5.975 14.525,5.975 C3.2
CHG_EN: D5.1 K13.4 Q5.3 | length 35.5
  Bottom Layer w0.254: K13.4@16.573,137.15 K13.4@16.575,137.15
  Bottom Layer w0.381: K13.4 17,132.3 22.1,127.2 22.1,119.5 ; Q5.3 20.975,119.5 22.1,119.5 ; D5.1 32.528,110.892 30.708,110.892 22.1,119.5
GND: C1.1 C2.1 C3.1 C4.1 C5.1 C6.1 C7.1 CON1.3 CON1.SH P1.16 P2.2 P3.4 P3.6 P3.8 P3.10 P3.12 P4.2 Q1.2 Q2.2 Q3.2 Q4.2 Q5.2 R5.1 R6.1 R12.1 TP23.1 TP94.1 TP147.1 U1.3 U1.6 U2.2 U2.4
  other v1: 23.2,3 25.5,3 18.8,15.7 29.2,21.1 42.3,23.2 21.2,27 80.4,34.7 8.1,35.4 88.2,39.3 13.2,40.3 15.367,40.3 17.533,40.3 19.7,40.3 55.3,40.7 70,40.9 40.6,41.1 13.2,42 15.367,42 17.533,42 19.7,42 97.2,42.9 93.9,43 13.2,43.7 15.367,43.7 17.533,43.7 19.7,43.7 13.2,45.4 15.367,45.4 17.533,45.4 19.7,45.4 80.8,47.9 72.9,48 85.8,48 77.3,48.1 15.8,56 28.9,56.6 47.6,56.6 95.327,57.42 42.7,68.7 94.5,70.6 46.9,72.8 55.5,74.6 53.1,79.1 7.5,80.6 78,83.8 31.6,85.1 19.4,85.2 95.248,86.023 8.6,86.9 69.9,100 55.3,100.2 37.8,100.3 83.9,107.1 71.3,110.8 42.377,111.248 62.5,111.4 54.8,128.6 41.3,130.2 75.4,130.3 85.9,130.4 63.7,130.7 19.3,133.9
MOTOR_ENC_INPUT: K1.1 K2.1 K3.1 K4.1 K5.1 K6.1 K7.1 K8.1 K9.1 K10.1 K11.1 K12.1 TP106.1 | length 225
  Top Layer w0.381: K10.1 K6.1 K2.1 K9.1 K5.1 K1.1 ; K3.1 K7.1 K11.1 K4.1 K8.1 K12.1
  Bottom Layer w0.381: TP106.1 13.976,52.967 20.267,52.967 ; K10.1@26.5,28.04 K10.1 24.9,29.5 24.9,48.333 20.267,52.967 ; K3.1 37.9,122.8 37.9,108 26.7,96.8 26.7,59.4 20.267,52.967
NetD1_1: D1.1 K1.4 K5.4 K9.4 Q1.3 | length 35.9
  Top Layer w0.381: K9.4 69.2,13.1 76,13.1 K5.4 K5.4@78.26,15.04 ; D1.1@78.47,8.15 D1.1 78.26,8.36 K5.4@78.26,15.04 ; K1.4 87,13.1 80.2,13.1 K5.4@78.26,15.04
  Bottom Layer w0.254: D1.1@78.47,8.15 Q1.3@81.875,8.15
NetD2_1: D2.1 K2.4 K6.4 K10.4 Q2.3 | length 36.3
  Top Layer w0.381: K10.4 36.2,13.1 43,13.1 K6.4 ; D2.1@45.26,8.36 45.26,15.04 47.2,13.1 54,13.1 K2.4
  Bottom Layer w0.254: K6.4 K6.4@45.26,15.04 ; D2.1@45.26,8.36 D2.1@45.42,8.2
  Bottom Layer w0.381: D2.1@45.42,8.2 46.375,8.2 Q2.3
NetD3_1: D3.1 K3.4 K7.4 K11.4 Q3.3 | length 70
  Top Layer w0.381: D3.1 30.8,118.22 30.8,135 K3.4 31.6,139.8 37.2,139.8 39.8,137.2 K7.4 42.6,139.8 48,139.8 K11.4
  Bottom Layer w0.254: K11.4 53.275,134.525 Q3.3
NetD4_1: D4.1 K4.4 K8.4 K12.4 Q4.3 | length 83.2
  Top Layer w0.381: K4.4 64.6,139.8 70.2,139.8 72.8,137.2 K8.4 75.6,139.8 81,139.8 K12.4 86.6,139.8 91.8,139.8 93.3,138.3 93.3,118.18 D4.1
  Bottom Layer w0.254: Q4.3 67.325,131.525 K8.4
NetK1_2: K1.2 TP34.1 | length 19.2
  Top Layer w0.254: v2(74.932,32.134) 75.098,32.3 81.7,32.3 83.56,30.44 K1.2
  Bottom Layer w0.254: TP34.1 74.7,36.19 74.932,35.958 v2(74.932,32.134)
NetK2_2: K2.2 TP46.1 | length 5.9
  Bottom Layer w0.254: TP46.1 55.879,35.981 55.879,30.661 K2.2
NetK3_2: K3.2 TP58.1 | length 16.4
  Bottom Layer w0.381: K3.2 36.61,113.95 TP58.1
NetK4_2: K4.2 TP70.1 | length 15.2
  Top Layer w0.381: TP70.1 60.4,112.06 60.4,120.36 K4.2
NetK5_2: K5.2 TP38.1 | length 11.8
  Bottom Layer w0.254: TP38.1 69.63,34.67 73.86,30.44 K5.2
NetK6_2: K6.2 TP50.1 | length 6.5
  Bottom Layer w0.254: K6.2 45.1,34.53 TP50.1
NetK7_2: K7.2 TP62.1 | length 14
  Bottom Layer w0.381: K7.2 39.8,110.48 TP62.1
NetK8_2: K8.2 TP74.1 | length 16.1
  Bottom Layer w0.381: TP74.1 69.253,112.123 69.253,118.213 K8.2
NetK9_2: K9.2 TP42.1 | length 8.7
  Bottom Layer w0.254: TP42.1 61.04,36.2 66.8,30.44 K9.2
NetK10_2: K10.2 TP54.1 | length 10
  Bottom Layer w0.254: K10.2 35.93,30.44 TP54.1
NetK11_2: K11.2 TP66.1 | length 13.6
  Bottom Layer w0.381: K11.2 50.8,109.64 TP66.1
NetK12_2: K12.2 TP78.1 | length 18.6
  Bottom Layer w0.381: TP78.1 70.8,108.675 83.8,121.675 K12.2
NetK13_2: K13.2 TP91.1 | length 21
  Bottom Layer w1: TP91.1 17,106.89 K13.2
NetP1_1: P1.1 TP136.1 | length 23.1
  Top Layer w0.381: P1.1 95.053,31.047 95.053,51.529 TP136.1
NetP1_2: P1.2 TP127.1 | length 40.6
  Top Layer w0.381: P1.2 95.341,29.13 92.513,31.958 92.513,57.392 95,59.879 95,65.395 TP127.1
NetP1_3: P1.3 TP118.1 | length 56.2
  Top Layer w0.381: P1.3 95.634,27.86 91.878,31.616 91.878,70.678 94.966,73.766 94.966,79.317 TP118.1
NetP1_4: P1.4 TP109.1 | length 73.3
  Top Layer w0.381: P1.4 95.634,26.59 91.243,30.981 91.243,85.317 95.093,89.167 95.093,94.684 TP109.1
NetP1_5: P1.5 TP134.1 | length 34.8
  Bottom Layer w0.381: P1.5 95.634,25.32 92.513,28.441 92.513,54.505 93.509,55.5 96.05,55.5 TP134.1
NetP1_6: P1.6 TP125.1 | length 50.4
  Bottom Layer w0.381: P1.6 95.634,24.05 91.878,27.806 91.878,67.978 93.07,69.17 TP125.1
NetP1_7: P1.7 TP116.1 | length 66.1
  Bottom Layer w0.381: P1.7 95.634,22.78 91.243,27.171 91.243,81.11 93.324,83.19 TP116.1
NetP1_8: P1.8 TP107.1 | length 83.5
  Bottom Layer w0.381: P1.8 95.634,21.51 90.608,26.536 90.608,96.208 92.83,98.43 TP107.1
NetP1_9: P1.9 TP77.1 | length 96.6
  Bottom Layer w0.254: TP77.1 82.4,93.18 82.4,40.5 87.919,34.981 87.919,28.021 P1.9
NetP1_10: P1.10 TP69.1 | length 106.1
  Bottom Layer w0.254: TP69.1 64.505,97.205 68.595,97.205 79.2,86.6 79.2,42.1 87.1,34.2 87.1,27.57 P1.10
NetP1_11: P1.11 TP61.1 | length 120.6
  Bottom Layer w0.254: TP61.1 53.27,93.2 69.2,93.2 75.7,86.7 75.7,51.1 75.7,43.7 85.7,33.7 85.7,27.7 P1.11
NetP1_12: P1.12 TP37.1 | length 40.7
  Bottom Layer w0.254: TP37.1 70.14,38.74 68.3,36.9 68.3,34.4 75.4,27.3 80.43,27.3 89.23,18.5 93.63,18.5 P1.12
NetP1_13: P1.13 TP45.1 | length 51.2
  Bottom Layer w0.254: TP45.1 56.93,34.17 65,26.1 80.1,26.1 88.7,17.5 93.36,17.5 P1.13
NetP1_14: P1.14 TP53.1 | length 64.2
  Bottom Layer w0.254: TP53.1 44.357,37.343 47.243,37.343 51.2,33.386 51.2,31.4 59.1,23.5 80.7,23.5 87.7,16.5 93.09,16.5 P1.14
NetP1_15: P1.15 TP88.1 | length 119.4
  Top Layer w0.254: TP88.1 28.53,71.6 v2(28.6,71.6) ; v2(91,20.2) 91,17.32 P1.15
  Bottom Layer w0.254: v2(28.6,71.6) 43.2,71.6 49.1,65.7 52.1,65.7 84.2,33.6 84.2,27 v2(91,20.2)
NetQ1_1: Q1.1 R7.2 | length 2
  Bottom Layer w0.254: R7.2 84.125,10.975 Q1.1
NetQ2_1: Q2.1 R8.2 | length 2.1
  Bottom Layer w0.381: R8.2 51.7,9.225 Q2.1 Q2.1@51.734,9.041
NetQ3_1: Q3.1 R9.2 | length 1.8
  Bottom Layer w0.254: Q3.1 57.009,117.646 R9.2
NetQ4_1: Q4.1 R10.2 | length 1.9
  Bottom Layer w0.254: R10.2 63.55,115.55 Q4.1
NetQ5_1: Q5.1 R14.2 | length 1.5
  Bottom Layer w0.254: R14.2@21.85,115.65 Q5.1
NetR1_1: R1.1 TP36.1 | length 18.1
  Top Layer w1: TP36.1 72.312,36.2 73.828,34.684 75.574,34.684 R1.1
NetR1_2: R1.2 TP40.1 | length 11.5
  Top Layer w1: TP40.1 66.216,36.2 64.304,38.112 64.304,41.194 R1.2
NetR2_1: R2.1 TP44.1 | length 15.3
  Top Layer w1: TP44.1 58.342,36.2 59.858,34.684 61.368,34.684 62.6,35.916 62.6,42.01 R2.1
NetR2_2: R2.2 TP48.1 | length 11.7
  Top Layer w1: R2.2 50.1,41.91 50.1,37.7 51.5,36.3 53.02,36.3 TP48.1
NetR3_1: R3.1 TP52.1 | length 15.3
  Top Layer w1: TP52.1 44.372,36.2 45.888,34.684 47.398,34.684 48.286,35.572 48.286,41.668 45.39,44.564 R3.1
NetR3_2: R3.2 TP56.1 | length 15
  Top Layer w1: R3.2 36.01,36.2 TP56.1
NetR4_1: R4.1 TP60.1 | length 15.1
  Top Layer w1: R4.1 32.61,106.734 35.982,110.106 37.492,110.106 39.008,108.59 TP60.1
NetR4_2: R4.2 TP64.1 | length 11.5
  Top Layer w1: TP64.1 45.104,108.59 50.39,103.304 R4.2
NetR5_2: R5.2 U1.10 | length 3.6
  Bottom Layer w0.254: U1.10 19.82,23.5 R5.2
NetR6_2: R6.2 U1.7 | length 5.4
  Top Layer w0.381: U1.7 10.27,25.43 10.27,28.07 10.8,28.6 v2(10.8,28.9)
  Bottom Layer w0.381: v2(10.8,28.9) R6.2
NetR7_1: R7.1 R8.1 R9.1 R10.1 R12.2 TP103.1 | length 198.2
  Top Layer w0.381: v2(18.59,59.41) 27.2,50.8 29.4,50.8 v2(31.1,49.1) ; v2(22.5,95.2) 35.7,95.2 41.753,101.253 41.753,106.947 42.896,108.09 42.896,109.696 46.712,113.512 57.188,113.512 v2(57.2,113.523)
  Bottom Layer w0.254: R12.2 31.1,25.3 45.296,11.104 R8.1 50.3,11.154 51.646,12.5 81.2,12.5 82.377,11.323 82.427,11.323 82.7,11.05 R7.1
  Bottom Layer w0.381: TP103.1 v2(18.59,59.41) 22.5,63.32 v2(22.5,95.2) ; R12.2 v2(31.1,49.1) ; v2(57.2,113.523) 57.2,115.791 R9.1@57.514,115.791 ; R9.1 59.9,116 61.1,117.2 R10.1
NetR11_1: R11.1 TP68.1 | length 22.8
  Top Layer w1: R11.1 49.3,95.4 52.5,98.6 52.5,104.526 49.8,107.226 49.8,108.684 51.222,110.106 52.732,110.106 54.248,108.59 TP68.1
NetR11_2: R11.2 TP72.1 | length 16.3
  Top Layer w1: TP72.1 59.57,108.49 60.444,108.49 62.256,106.678 62.256,98.934 R11.2
NetR13_1: R13.1 TP76.1 | length 14.7
  Top Layer w1: R13.1@65.3,100.1 65.3,105.596 64.204,106.692 64.204,109.304 65.006,110.106 66.602,110.106 68.118,108.59 TP76.1
NetR13_2: R13.2 TP80.1 | length 13.2
  Top Layer w1: TP80.1 74.5,108.59 R13.2
NetR14_1: R14.1 TP98.1 | length 46.9
  Bottom Layer w0.254: TP98.1 10.611,76.969 10.611,99.911 12,101.3 14.4,101.3 19.1,106 19.1,114.3 R14.1
NetTP92_1: TP92.1 TP99.1 | length 31
  Bottom Layer w0.254: TP99.1 14.9,74.34 14.9,78.4 11.119,82.181 11.119,98.449 TP92.1
NetTP93_1: TP93.1 TP100.1 | length 31.7
  Bottom Layer w0.254: TP100.1 12.77,69.77 16.1,73.1 16.1,78.7 11.627,83.173 11.627,96.417 TP93.1
NetTP97_1: TP97.1 TP101.1 | length 30.7
  Top Layer w0.254: TP97.1 v2(20,77.53)
  Bottom Layer w0.254: TP101.1 16.06,61.96 20,65.9 v2(20,77.53)
NetTP104_1: TP104.1 TP105.1 | length 11.9
  Bottom Layer w0.254: TP105.1 10.8,56.28 10.8,62.6 12.76,64.56 TP104.1
NetTP108_1: TP108.1 TP110.1 | length 2.5
  Bottom Layer w0.254: TP110.1 TP108.1
NetTP111_1: TP111.1 TP112.1 TP113.1 | length 4.9
  Bottom Layer w0.254: TP112.1 95.03,92.08 ; TP113.1 95.03,92.08 ; TP111.1 95.03,92.08
NetTP117_1: TP117.1 TP119.1 | length 2.5
  Bottom Layer w0.254: TP119.1 TP117.1
NetTP120_1: TP120.1 TP121.1 TP122.1 | length 4.9
  Bottom Layer w0.254: TP121.1 95.03,76.84 ; TP122.1 95.03,76.84 ; TP120.1 95.03,76.84
NetTP126_1: TP126.1 TP128.1 | length 2.5
  Bottom Layer w0.254: TP128.1 TP126.1
NetTP129_1: TP129.1 TP130.1 TP131.1 | length 4.9
  Bottom Layer w0.254: TP130.1 94.965,62.82 ; TP131.1 94.965,62.82 ; TP129.1 94.965,62.82
NetTP135_1: TP135.1 TP137.1 | length 2.5
  Bottom Layer w0.254: TP137.1 TP135.1
NetTP138_1: TP138.1 TP139.1 TP140.1 | length 4.9
  Bottom Layer w0.254: TP139.1 94.99,48.925 ; TP140.1 94.99,48.925 ; TP138.1 94.99,48.925
RESET: P3.15 TP29.1 | length 45
  Top Layer w0.254: P3.15 13.036,78.76 29.496,62.3 37.96,62.3 TP29.1
SPK+: CON1.4 TP148.1 | length 23.2
  Top Layer w0.254: v2(2.3,61.6) 4,63.3 14.4,63.3 17.2,66.1 17.2,68.34 TP148.1
  Bottom Layer w0.254: v2(2.3,61.6) 2.325,61.575 4.625,61.575 CON1.4
SPK-: CON1.5 TP149.1 | length 19.9
  Top Layer w0.254: v2(4.6,59) 6.153,60.553 13.853,60.553 18.47,65.17 TP149.1
  Bottom Layer w0.254: v2(4.6,59) 4.6,60.5 CON1.5
SWCLK: P3.9 TP20.1 | length 37.5
  Top Layer w0.254: P3.9 11.43,82.57 30.1,63.9 31.91,63.9 TP20.1
SWDIO: P3.7 TP26.1 | length 44.1
  Top Layer w0.254: P3.7 11.16,83.84 30.433,64.567 31.643,64.567 32.4,65.324 32.4,66.2 33.053,66.853 37.727,66.853 TP26.1
VBAT: P4.1 TP84.1 | length 25.7
  Top Layer w1: P4.1 8.43,47.91 TP84.1
VTref: P3.1 TP17.1 | length 35.6
  Top Layer w0.254: P3.1 7.92,84.4 11.514,84.4 30.204,65.71 TP17.1
WS2812_D: CON1.2 TP146.1 | length 17
  Top Layer w0.254: v2(2.5,63.9) 4.5,65.9 14.71,65.9 TP146.1
  Bottom Layer w0.254: v2(2.5,63.9) 2.677,63.723 4.477,63.723 CON1.2
pads on no net: P3.2 P3.3 P3.5 P3.11 P3.13 P3.14 P3.16 P3.17 P3.18 P3.19 P3.20 TP1.1 TP2.1 TP3.1 TP4.1 TP5.1 TP6.1 TP7.1 TP8.1 TP9.1 TP10.1 TP11.1 TP12.1 TP13.1 TP14.1 TP15.1 TP16.1 TP18.1 TP19.1 TP21.1 TP22.1 TP24.1 TP25.1 TP27.1 TP28.1 TP30.1 TP31.1 TP32.1 TP33.1 TP35.1 TP39.1 TP41.1 TP43.1 TP47.1 TP49.1 TP51.1 TP55.1 TP57.1 TP59.1 TP63.1 TP65.1 TP67.1 TP71.1 TP73.1 TP75.1 TP79.1 TP81.1 TP82.1 TP85.1 TP86.1 TP87.1 TP89.1 TP90.1 TP95.1 TP96.1 TP102.1 TP114.1 TP115.1 TP123.1 TP124.1 TP132.1 TP133.1 TP141.1 TP142.1 TP143.1 TP144.1 TP150.1 U1.1 U1.8
copper on no net:
  other v1: 16.5,34.4

## Polygon pours and split planes (outlines as drawn)
GND on Top Layer "Top Layer-GND" (solid, remove dead copper, pour order 0): 0,145.3 100.6,145.3 100.6,0 0,0
GND on Bottom Layer "Bottom Layer-GND" (solid, remove dead copper, pour order 2): 0,145.3 100.6,145.3 100.6,0 0,0

## Other copper
Multi-Layer:
  the board outline again, w0.1

## Silkscreen, mask and mechanical layers (free items; w line width, h text height)
Bottom Overlay:
  lines w0.254: 97.2,11.3 97.6,11.3 97.6,8.8 98,8.8 ; 97.2,12.7 98,12.7 ; 97.2,13.7 97.2,20.4 ; 97.2,21.3 97.2,25.5 ; 97.2,26.4 97.2,30.5
  lines w0.381: 0,86.5 0,32 2.7,32 ; 11.4,113 94.7,113 ; 22.8,32 100.6,32 ; 25.4,113 25.4,141.6
  text "CHG Enable" at 14.5,136.9 h1.52 r90
  text "Pins point toward / the other side!" at 85.6,96.5 h1.52 r90
  text "Test Pins" at 48.1,77.8 h2.54
  text "Programmer" at 0.2,73.5 h1.52 r270
  text "LED" at 0.9,67.1 h1.52 r270
  text "-" at 0.9,54.9 h1.27 r180
  text "+" at 3.4,54.9 h1.27 r180
  text "7805" at 23.7,42 h1.52 r90
  text "Battery" at 0.3,33.3 h2.54 r270
  text "Voltage measurement" at 93.8,31.6 h1.52 r90
  text "3V3" at 99.1,30.04 h1.02 r90
  text "5V" at 99.1,24.44 h1.02 r90
  text "PTH08T231W" at 2.7,22 h1.52 r90
  text "5V" at 99.2,18.24 h1.02 r90
  text "4.5V" at 99.5,14.44 h1.02 r90
  text "GND" at 99.5,10.14 h1.02 r90
  text "+" at 11.3,6.2 h1.27 r180
  text "-" at 11.3,3.6 h1.27 r180
  text "10V" at 8,2.8 h2.54

## Text inside footprints (layer, text, board x,y; h text height)
CON1: Bottom Assembly "1" at 3.6,64.75 h1 r90; Bottom Assembly "5" at 3.6,60.75 h1 r90
P3: Bottom Overlay "19" at 7.5,75.6 h1; Bottom Overlay "1" at 6.5,87.1 h1